# EAGLE board d11_micro_usb_std_v2 (EAGLE 7.3.0)
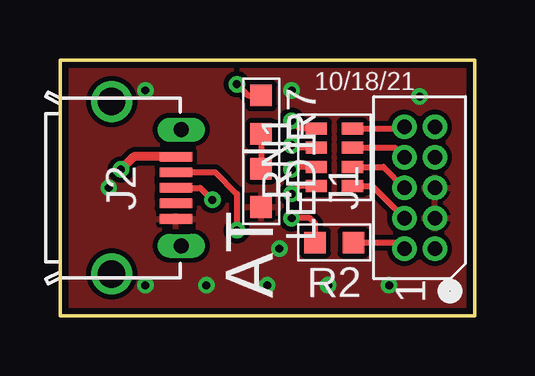
[diagram p0: board, top side]
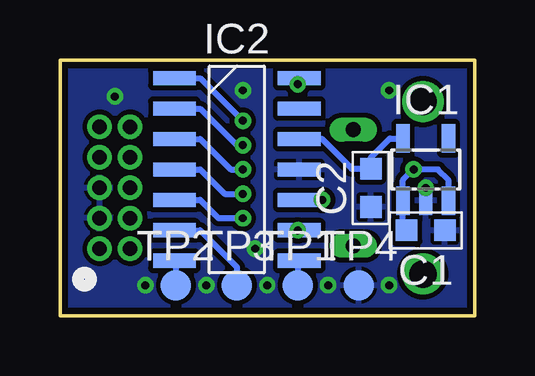
[diagram p1: board, bottom side, seen from below]

Size 17.27 x 10.67 mm. Coordinates in mm from the lower left corner, seen from the top.
Outline: 0,0 17.27,0 17.27,10.67 0,10.67 0,0
Copper layers (1*16): Top 0.0356mm / dielectric 1.5011mm / Bottom 0.0356mm
Design rules "std-tented-new": minimum track width 8mil, minimum drill 12mil, track to track 6mil, track to pad 6mil, pad to pad 6mil, via to via 6mil, smd to smd 0mil, copper to edge 10mil, drill to drill 6mil, minimum pad ring 7mil, minimum via ring 7mil, stop-mask expansion 3mil, vias tented up to drill 25mil, thermal gap 6mil

## Footprints (pad centres in the part's own frame; a part is rotated, then mirrored left to right if it is on the bottom)
SMD0603 = smd 0.9 x 0.9: 1 -0.8,0; 2 0.8,0
SOT23-5 = smd 0.55 x 1.2: 1 -0.95,-1.3; 2 0,-1.3; 3 0.95,-1.3; 4 0.95,1.3; 5 -0.95,1.3
SO-14 = smd 0.6 x 1.778: 1 -3.81,-2.6; 2 -2.54,-2.6; 3 -1.27,-2.6; 4 0,-2.6; 5 1.27,-2.6; 6 2.54,-2.6; 7 3.81,-2.6; 8 3.81,2.6; 9 2.54,2.6; 10 1.27,2.6; 11 0,2.6; 12 -1.27,2.6; 13 -2.54,2.6; 14 -3.81,2.6
HEADER-5X2-1.27MM = drill 0.61 pad 1.016: 1 -2.54,-0.635; 2 -2.54,0.635; 3 -1.27,-0.635; 4 -1.27,0.635; 5 0,-0.635; 6 0,0.635; 7 1.27,-0.635; 8 1.27,0.635; 9 2.54,-0.635; 10 2.54,0.635
USB-B-MICRO-SMT-SHELL-TH = smd 1.35 x 0.4: 1 4.825,1.3; 2 4.825,0.65; 3 4.825,0; 4 4.825,-0.65; 5 4.825,-1.3 | drill 1.143: M1 2.15,-3.6; M2 2.15,3.6 | drill 0.635 long: M3 5.05,2.425; M4 5.05,-2.425
SMD0603-X4 = smd 0.5 x 0.889: 1 -1.2,-0.752; 2 -0.4,-0.752; 3 0.4,-0.752; 4 1.2,-0.752; 5 1.2,0.752; 6 0.4,0.752; 7 -0.4,0.752; 8 -1.2,0.752
TP-1.27MM = smd 1.27 x 1.27: 1 0,0

## Placement (x,y rotation side)
C1  1uF  [SMD0603]  2.03,3.56 180 bottom
C2  1uF  [SMD0603]  4.32,5.33 90 bottom
IC1  MIC5504-3.3  [SOT23-5]  2.03,6.1 0 bottom
IC2  ATSAMD11C  [SO-14]  9.91,6.1 270 bottom
J1  HEADER-5X2-TH-1.27  [HEADER-5X2-1.27MM]  14.99,5.33 90 top
J2  [USB-B-MICRO-SMT-SHELL-TH]  0,5.33 0 top
LED1  ORANGE  [SMD0603]  8.38,5.33 270 top
R2  100  [SMD0603]  11.43,3.05 180 top
R7  470  [SMD0603]  8.38,8.38 270 top
RN1  100  [SMD0603-X4]  11.43,6.6 90 top
TP1  SIO  [TP-1.27MM]  7.37,1.27 0 bottom
TP2  [TP-1.27MM]  12.45,1.27 0 bottom
TP3  [TP-1.27MM]  9.91,1.27 0 bottom
TP4  [TP-1.27MM]  4.83,1.27 0 bottom

## Library data of the parts
C1 C2 R2 R7 RN1 = ataradov_rlc
IC1 = ataradov_vreg
IC2 = ataradov_mcu
J1 J2 = ataradov_conn
LED1 = ataradov_led
TP1-TP4 = ataradov_misc

## Nets
+3V3: C2.2 IC1.5 IC2.12
GND: C1.1 C2.1 IC1.2 IC2.11 J1.3 J1.5 J2.5 LED1.2 TP4.1
N$1: IC2.9 J2.2
N$2: IC2.10 J2.3
N$3: LED1.1 R7.2
N$5: J1.2 R2.1
N$9: J1.4 RN1.1
N$10: J1.6 RN1.2
N$11: J1.8 RN1.3
N$12: J1.10 RN1.4
PA02: IC2.13
PA04: IC2.14 R7.1
PA05: IC2.1 RN1.5
PA08: IC2.2 RN1.6
PA09: IC2.3 RN1.7
PA14: IC2.4 RN1.8
PA15: IC2.5 R2.2
RESET: IC2.6 TP3.1
SWCLK: IC2.7 TP2.1
SWDIO: IC2.8 TP1.1
V_USB: C1.2 IC1.1 IC1.3 J2.1

## Tracks (layer width: path | path; a pad name or v marks a point on that pad's centre or on a via)
+3V3
  Bottom 0.254: IC1.5 3.53,7.4 4.32,6.6 C2.2 5.12,6.13 6.35,7.37 IC2.12
GND  (via drill 0.33 pad 0.25)
  other vias: 8.64,1.27 3.56,9.4 9.65,9.4 14.99,9.14 6.1,1.27 11.18,1.27 13.72,1.27 3.56,1.27 9.14,2.79 2.03,5.33
  pour Bottom (isolate 0.203): 0,10.67 17.27,10.67 17.27,0 0,0
  pour Top (isolate 0.203): 0,10.67 17.27,10.67 17.27,0 0,0
N$1  (via drill 0.33)
  Top 0.254: J2.2 6.46,5.98 7.37,5.08 v7.37,3.56
  Bottom 0.254: IC2.9 v7.37,3.56
N$2  (via drill 0.33)
  Top 0.254: J2.3 5.84,5.33 v6.35,4.83
  Bottom 0.254: v6.35,4.83 IC2.10
N$3
  Top 0.254: R7.2 LED1.1
N$5
  Top 0.254: R2.1 14.1,3.05 J1.2
N$9
  Top 0.254: RN1.1 13.01,5.4 J1.4
N$10
  Top 0.254: RN1.2 13.48,6.2 J1.6
N$11
  Top 0.254: RN1.3 13.95,7 J1.8
N$12
  Top 0.254: RN1.4 14.28,7.8 J1.10
PA04  (via drill 0.33 pad 0.25)
  Top 0.254: v7.37,9.65 7.84,9.18 R7.1
  Bottom 0.254: IC2.14 7.37,9.85 v7.37,9.65
PA05  (via drill 0.33)
  Top 0.254: RN1.5 9.98,7.8 v9.65,8.13
  Bottom 0.254: IC2.1 11.43,9.91 v9.65,8.13
PA08  (via drill 0.33)
  Top 0.254: RN1.6 9.76,7 v9.65,7.11
  Bottom 0.254: IC2.2 11.43,8.64 9.91,7.11 v9.65,7.11
PA09  (via drill 0.33)
  Top 0.254: RN1.7 9.76,6.2 v9.65,6.1
  Bottom 0.254: IC2.3 11.43,7.37 10.16,6.1 v9.65,6.1
PA14  (via drill 0.33)
  Top 0.254: RN1.8 9.98,5.4 v9.65,5.08
  Bottom 0.254: IC2.4 11.43,6.1 10.41,5.08 v9.65,5.08
PA15  (via drill 0.33)
  Top 0.254: R2.2 10.63,3.85 10.41,4.06 v9.65,4.06
  Bottom 0.254: IC2.5 11.43,4.83 10.67,4.06 v9.65,4.06
RESET
  Bottom 0.254: IC2.6 11.43,3.56 9.91,2.03 TP3.1
SWCLK
  Bottom 0.254: IC2.7 12.45,2.23 TP2.1
SWDIO
  Bottom 0.254: IC2.8 7.37,2.23 TP1.1
V_USB  (via drill 0.33)
  Top 0.381: J2.1 3.08,6.63 v2.54,6.1
  Bottom 0.254: IC1.3 1.08,5.65 1.52,6.1 v2.54,6.1 2.98,5.65 IC1.1 | IC1.1 3.02,4.8 | C1.2 2.98,3.71 IC1.1

## Text on the board
tPlace: 10/18/21 | AT | 1